# Altium PCB qfn-stencil.PcbDoc
Units mil, origin at the board's own origin, x right, y up, seen from the top; angles counter-clockwise.
Board outline 6000 x 4000 mil, 2 copper layers (Top Layer, Bottom Layer); 1 components, 0 nets, 27 pads, 0 vias.
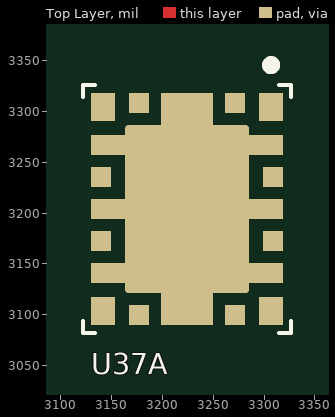
[diagram p0: Top Layer view]
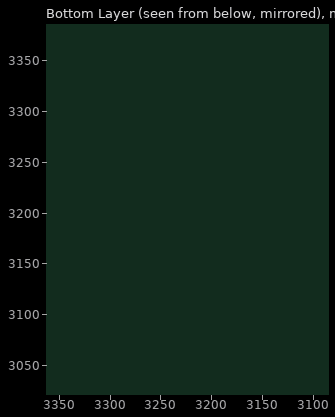
[diagram p1: Bottom Layer view, seen from below]

## Layer stack, top to bottom
Top Solder: solder mask 0.4, Solder Resist, Dk 3.5
Top Layer: signal copper 1.4
Dielectric 1: dielectric 12.6, FR-4, Dk 4.8
Bottom Layer: signal copper 1.4
Bottom Solder: solder mask 0.4, Solder Resist, Dk 3.5

## Board outline
1000,1000 7000,1000 7000,5000 1000,5000

## Design rules (kind name [scope] priority, off if disabled: settings)
Clearance [All] p1: gap=10 ignorepadtopadclearanceinfootprint=FALSE except(0: Arc-Hole Track-Hole SMDPad-Hole THPad-Hole Via-Hole Fill-Hole Poly-Hole Region-Hole Text-Hole)
PolygonConnect [All] p1: connectstyle=Relief reliefconductorwidth=10 reliefentries=4 polygonreliefangle="90 Angle" airgapwidth=10
RoutingVias [All] p1: holewidth=28 width=50 viastyle="Through Hole" minholewidth=28 minwidth=50 maxholewidth=28 maxwidth=50
SolderMaskExpansion [All] p1: expansion=4
Width [All] p1: maxlimit=10 minlimit=10 preferedwidth=10
30 further rules are at their usual default settings.

## Components (designator, comment, footprint, x,y, rotation, side; value= is the part's Value field where it differs from the comment)
U37A "ALM-31122" ALM-31122 3224.13,3203.9 r270 top (schematic designator U37)

## Footprints (in the part's own frame and the unit in brackets; to place one, negate y for a bottom-side part, rotate by r counter-clockwise, add the part's x,y. Pads: shape width x height; smd on the part's side, far side on the other; paste and mask are expansions set on the pad)
ALM-31122 [mm] "ALM-31122 Power Amplifier Package"
  rect 0.7x0.6 smd: 1(-2.55,2.1) 6(-2.55,-2.1) 12(2.55,-2.1) 17(2.55,2.1)
  rect 0.5x0.5 smd: 2(-2.65,1.2) 3(-2.65,0.4) 4(-2.65,-0.4) 5(-2.65,-1.2) 7(-1.6,-2.15) 8(-0.8,-2.15) 9(0,-2.15) 10(0.8,-2.15) 11(1.6,-2.15) 13(2.65,-1.2) 14(2.65,-0.4) 15(2.65,0.4) 16(2.65,1.2) 18(1.6,2.15) 19(0.8,2.15) 20(0,2.15) 21(-0.8,2.15) 22(-1.6,2.15)
  rect 0.5x4.8 smd: 23(-1.6,0) 23(0,0) 23(1.6,0)
  rect 5.8x1.3 smd: 23(0,0)
  rrect5% 4.2x3.1 smd: 23(0,0)
  silkscreen extent -3.7,-2.6 3.1,2.6, body extent -2.9,-2.4 2.9,2.4, height 1

## Part data
U37A: "1-watt High-Linearity Power Amplifier", Manufacturer=Avago, Manufacturer P/N=ALM-31122

## Nets (pads, with @x,y where several pads share a name; then routed paths per layer and width w, separated by ;. In a path a pad name is that pad's centre, name@x,y a point inside that pad or via, vN(x,y) a via of type N, cw(c..) or ccw(c..) an arc to the next point about the centre after c; other vN are vias at no path point)
pads on no net: U37A.1 U37A.2 U37A.3 U37A.4 U37A.5 U37A.6 U37A.7 U37A.8 U37A.9 U37A.10 U37A.11 U37A.12 U37A.13 U37A.14 U37A.15 U37A.16 U37A.17 U37A.18 U37A.19 U37A.20 U37A.21 U37A.22 U37A.23